# EAGLE board lighthouse_board (EAGLE 6.5.0)
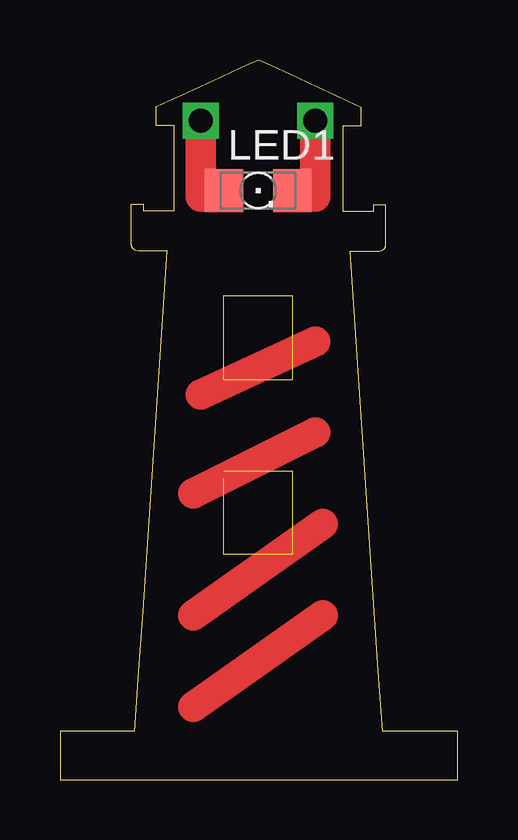
[diagram p0: board, top side]

Size 16.57 x 30 mm. Coordinates in mm from the lower left corner, seen from the top.
Outline: 13.44,2.01 13.27,4.52 13.1,7.02 12.93,9.52 12.76,12.02 12.59,14.52 12.42,17.02 12.25,19.53 12.08,22.03 13.24,22.03 13.29,22.03 13.32,22.04 13.36,22.05 13.39,22.06 13.45,22.08 13.47,22.1 13.49,22.11 13.51,22.13 13.52,22.14 13.53,22.16 13.55,22.18 13.56,22.2 13.56,22.21 13.57,22.23 13.57,22.24 13.58,22.25 13.58,22.27 13.58,22.28 13.58,22.29 13.58,22.29 13.58,23.94 13.05,23.94 13.05,23.67 11.8,23.67 11.8,27.27 12.55,27.27 12.55,28.01 12.01,28.26 11.48,28.51 10.95,28.76 10.41,29 9.88,29.25 9.34,29.5 8.81,29.75 8.28,30 7.74,29.75 7.2,29.51 6.67,29.26 6.13,29.01 5.6,28.77 5.06,28.52 4.52,28.27 3.99,28.03 3.99,27.29 4.74,27.29 4.74,23.69 3.49,23.69 3.49,23.96 2.96,23.96 2.96,22.31 2.96,22.3 2.96,22.29 2.96,22.28 2.96,22.27 2.97,22.26 2.97,22.24 2.98,22.23 2.98,22.21 2.99,22.2 3.01,22.18 3.02,22.16 3.03,22.14 3.05,22.13 3.07,22.11 3.09,22.1 3.12,22.09 3.15,22.07 3.18,22.06 3.26,22.05 3.3,22.04 4.46,22.04 4.29,19.54 4.12,17.04 3.95,14.53 3.78,12.03 3.61,9.53 3.44,7.02 3.27,4.52 3.1,2.01 0,2.01 0,0 16.57,0 16.57,2.01 13.44,2.01
Copper layers (1*16): Top 0.035mm / dielectric 1.5mm / Bottom 0.035mm
Design rules "default": minimum track width 10mil, minimum drill 24mil, track to track 8mil, track to pad 8mil, pad to pad 8mil, via to via 8mil, smd to smd 8mil, copper to edge 40mil, drill to drill 8mil, minimum pad ring 10mil, minimum via ring 8mil, stop-mask expansion 4mil, vias tented up to drill 0mil, thermal gap 10mil

## Footprints (pad centres in the part's own frame; a part is rotated, then mirrored left to right if it is on the bottom)
1206 = smd 1.6 x 1.803: A -1.422,0; C 1.422,0

## Placement (x,y rotation side)
LED1  [1206]  8.26,24.55 0 top

## Library data of the parts
LED1 = adafruit

## Tracks (layer width: path | path; a pad name or v marks a point on that pad's centre or on a via)
N$1  (via drill 1)
  Top 1.27: v5.87,27.48 5.87,24.3
N$2
  Top 1.27: 10.63,18.27 5.87,16.05 | 10.63,14.46 5.55,11.92 | 10.95,6.84 5.55,3.03 | 10.95,10.65 5.55,6.84
N$3  (via drill 1)
  Top 1.27: v10.63,27.48 10.63,24.3
N$4  (8 unrouted)